# Altium PCB cando_pro_set.PcbDoc (part 3 of 3)
Units mm, origin at the board's own origin, x right, y up, seen from the top; angles counter-clockwise.
Board outline 91.6 x 86.4 mm, 2 copper layers (Top Layer, Bottom Layer); 320 components, 25 nets, 1260 pads, 588 vias.
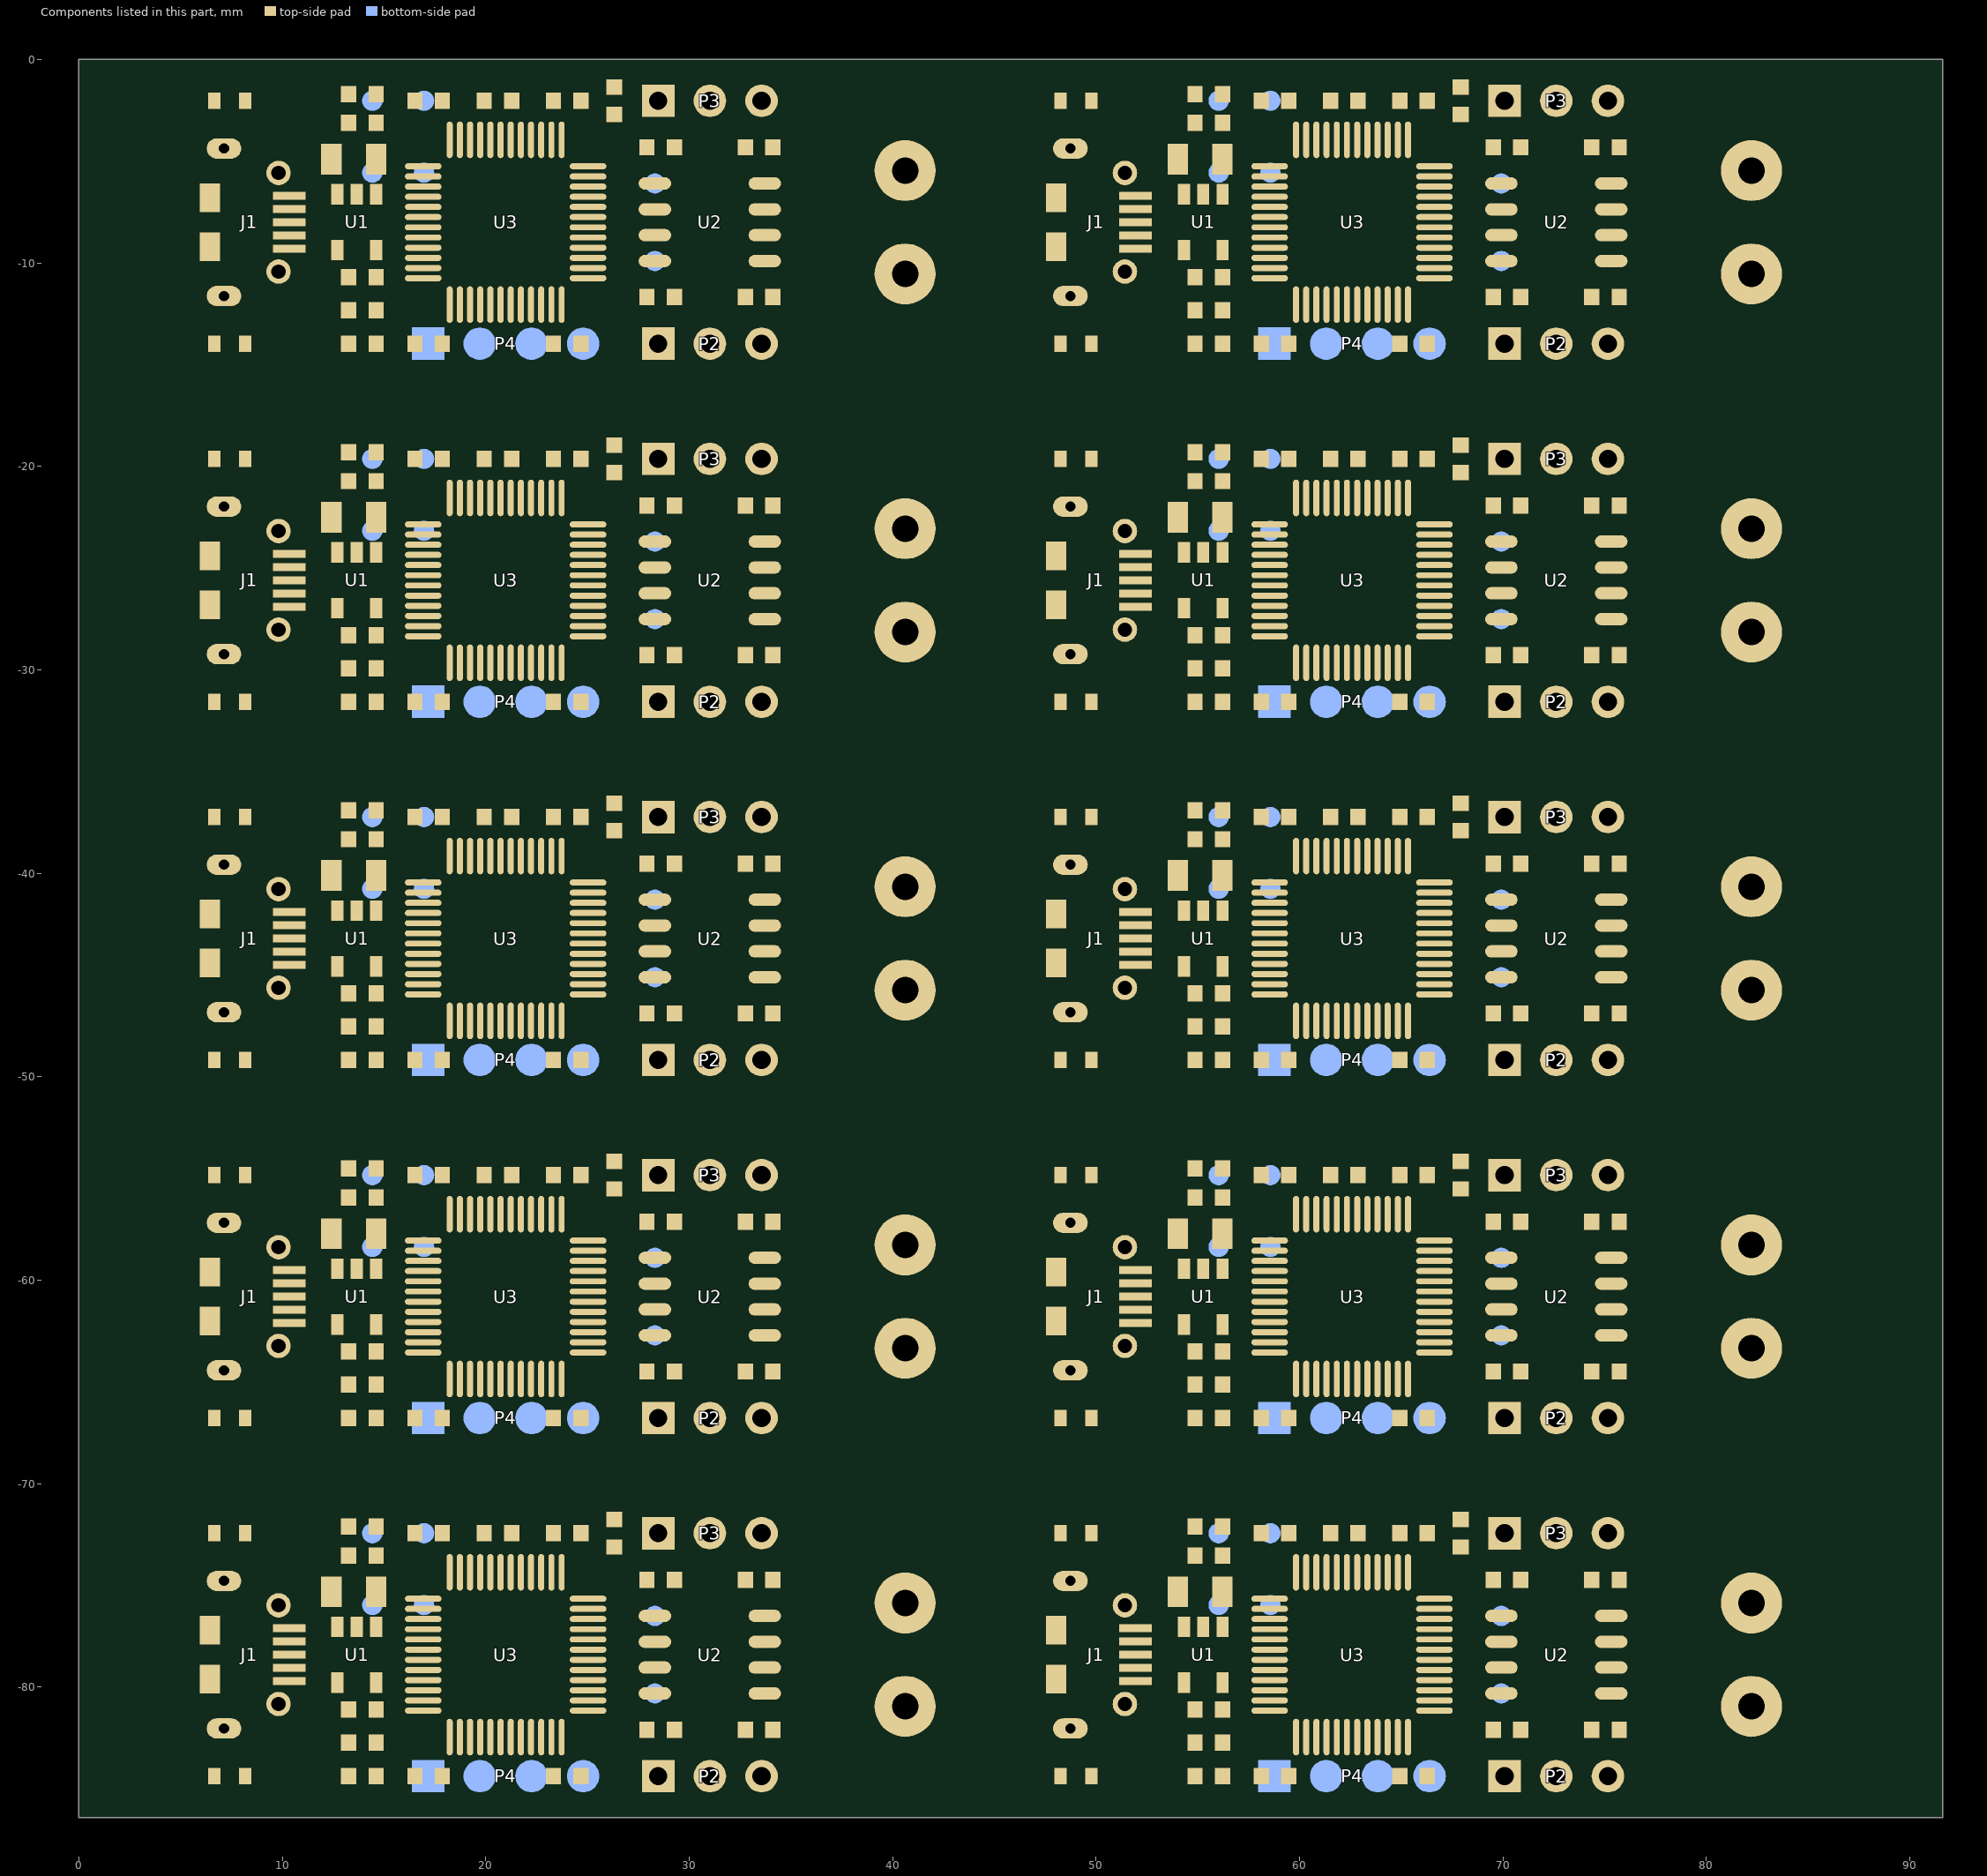
[diagram p3: the components of this part, seen from the top]

## Polygon pours and split planes (outlines as drawn) (continued)
no net on Bottom Layer "Bottom" (solid, remove dead copper, pour order 86): 47.6,-68.8 cw(c47.6,-67.8) 46.6,-67.8 46.6,-53.8 cw(c47.6,-53.8) 47.6,-52.8 50.6,-52.801 50.6,-52.8 ccw(c51.6,-52.8) 52.6,-52.8 52.6,-52.801 80.6,-52.8 ccw(c81.6,-52.8) 82.6,-52.8 85.6,-52.8 cw(c85.6,-53.8) 86.6,-53.8 86.6,-67.8 cw(c85.6,-67.8) 85.6,-68.8 82.6,-68.799 82.6,-68.8 ccw(c81.6,-68.8) 80.6,-68.8 80.6,-68.799 52.6,-68.799 52.6,-68.8 ccw(c51.6,-68.8) 50.6,-68.8 50.6,-68.799
no net on Bottom Layer "Bottom" (solid, remove dead copper, pour order 90): 6,-86.4 cw(c6,-85.4) 5,-85.4 5,-71.4 cw(c6,-71.4) 6,-70.4 9,-70.401 9,-70.4 ccw(c10,-70.4) 11,-70.4 11,-70.401 39,-70.4 ccw(c40,-70.4) 41,-70.4 44,-70.4 cw(c44,-71.4) 45,-71.4 45,-85.4 cw(c44,-85.4) 44,-86.4 41,-86.399 41,-86.4 ccw(c40,-86.4) 39,-86.4 39,-86.399 11,-86.399 11,-86.4 ccw(c10,-86.4) 9,-86.4 9,-86.399
no net on Bottom Layer "Bottom" (solid, remove dead copper, pour order 94): 47.6,-86.4 cw(c47.6,-85.4) 46.6,-85.4 46.6,-71.4 cw(c47.6,-71.4) 47.6,-70.4 50.6,-70.401 50.6,-70.4 ccw(c51.6,-70.4) 52.6,-70.4 52.6,-70.401 80.6,-70.4 ccw(c81.6,-70.4) 82.6,-70.4 85.6,-70.4 cw(c85.6,-71.4) 86.6,-71.4 86.6,-85.4 cw(c85.6,-85.4) 85.6,-86.4 82.6,-86.399 82.6,-86.4 ccw(c81.6,-86.4) 80.6,-86.4 80.6,-86.399 52.6,-86.399 52.6,-86.4 ccw(c51.6,-86.4) 50.6,-86.4 50.6,-86.399

## Keep-outs
Keep-Out Layer:
  lines w0.15: 9,-68.8 cw(c10,-68.8) 11,-68.8 21.8,-68.8 21.8,-70.4 11,-70.4 cw(c10,-70.4) 9,-70.4 6,-70.4 ccw(c6,-71.4) 5,-71.4 5,-85.4 ccw(c6,-85.4) 6,-86.4 ; 9,-68.799 6,-68.8 cw(c6,-67.8) 5,-67.8 5,-53.8 cw(c6,-53.8) 6,-52.8 9,-52.801 ccw(c10,-52.8) 11,-52.8 21.8,-52.8 21.8,-51.2 11,-51.2 ccw(c10,-51.2) 9,-51.2 ; 9,-51.199 6,-51.2 cw(c6,-50.2) 5,-50.2 5,-36.2 cw(c6,-36.2) 6,-35.2 9,-35.201 ; 9,-35.2 ccw(c10,-35.2) 11,-35.2 21.8,-35.2 21.8,-33.6 11,-33.6 ccw(c10,-33.6) 9,-33.6 6,-33.6 cw(c6,-32.6) 5,-32.6 5,-18.6 cw(c6,-18.6) 6,-17.6 9,-17.601 ccw(c10,-17.6) 11,-17.6 21.8,-17.6 21.8,-16 11,-16 ccw(c10,-16) 9,-16 6,-16 cw(c6,-15) 5,-15 5,-1 cw(c6,-1) 6,0 ; 41,-86.4 ccw(c40,-86.4) 39,-86.4 11,-86.399 ccw(c10,-86.4) 9,-86.4 6,-86.4 ; 41,-86.399 44,-86.4 ccw(c44,-85.4) 45,-85.4 45,-81.6 46.6,-81.6 46.6,-85.4 ccw(c47.6,-85.4) 47.6,-86.4 50.6,-86.399 cw(c51.6,-86.4) 52.6,-86.4 80.6,-86.399 cw(c81.6,-86.4) 82.6,-86.4 ; 41,-68.8 ccw(c40,-68.8) 39,-68.8 28.2,-68.8 28.2,-70.4 39,-70.4 ccw(c40,-70.4) 41,-70.4 44,-70.4 cw(c44,-71.4) 45,-71.4 45,-75.2 46.6,-75.2 46.6,-71.4 cw(c47.6,-71.4) 47.6,-70.4 50.6,-70.401 ccw(c51.6,-70.4) 52.6,-70.4 63.4,-70.4 63.4,-68.8 52.6,-68.8 ccw(c51.6,-68.8) 50.6,-68.8 ; 41,-68.799 44,-68.8 ccw(c44,-67.8) 45,-67.8 45,-64 46.6,-64 46.6,-67.8 ccw(c47.6,-67.8) 47.6,-68.8 50.6,-68.799 ; 41,-52.8 44,-52.8 cw(c44,-53.8) 45,-53.8 45,-57.6 46.6,-57.6 46.6,-53.8 cw(c47.6,-53.8) 47.6,-52.8 50.6,-52.801 ccw(c51.6,-52.8) 52.6,-52.8 63.4,-52.8 63.4,-51.2 52.6,-51.2 ccw(c51.6,-51.2) 50.6,-51.2 ; 41,-52.8 cw(c40,-52.8) 39,-52.8 28.2,-52.8 28.2,-51.2 39,-51.2 cw(c40,-51.2) 41,-51.2 ; 41,-51.199 44,-51.2 ccw(c44,-50.2) 45,-50.2 45,-46.4 46.6,-46.4 46.6,-50.2 ccw(c47.6,-50.2) 47.6,-51.2 50.6,-51.199 ; 41,-16 ccw(c40,-16) 39,-16 28.2,-16 28.2,-17.6 39,-17.6 ccw(c40,-17.6) 41,-17.6 44,-17.6 cw(c44,-18.6) 45,-18.6 45,-22.4 46.6,-22.4 46.6,-18.6 cw(c47.6,-18.6) 47.6,-17.6 50.6,-17.601 ccw(c51.6,-17.6) 52.6,-17.6 63.4,-17.6 63.4,-16 52.6,-16 ccw(c51.6,-16) 50.6,-16 47.6,-16 cw(c47.6,-15) 46.6,-15 46.6,-11.2 45,-11.2 45,-15 cw(c44,-15) 44,-16 41,-15.999 ; 50.6,-35.201 47.6,-35.2 ccw(c47.6,-36.2) 46.6,-36.2 46.6,-40 45,-40 45,-36.2 ccw(c44,-36.2) 44,-35.2 41,-35.2 cw(c40,-35.2) 39,-35.2 28.2,-35.2 28.2,-33.6 39,-33.6 cw(c40,-33.6) 41,-33.6 44,-33.6 ccw(c44,-32.6) 45,-32.6 45,-28.8 46.6,-28.8 46.6,-32.6 ccw(c47.6,-32.6) 47.6,-33.6 50.6,-33.599 cw(c51.6,-33.6) 52.6,-33.6 63.4,-33.6 63.4,-35.2 52.6,-35.2 cw(c51.6,-35.2) 50.6,-35.2 ; 82.6,-86.399 85.6,-86.4 ; 82.6,-68.8 ccw(c81.6,-68.8) 80.6,-68.8 69.8,-68.8 69.8,-70.4 80.6,-70.4 ccw(c81.6,-70.4) 82.6,-70.4 85.6,-70.4 cw(c85.6,-71.4) 86.6,-71.4 86.6,-85.4 cw(c85.6,-85.4) 85.6,-86.4 ; 82.6,-68.799 85.6,-68.8 ccw(c85.6,-67.8) 86.6,-67.8 86.6,-53.8 ccw(c85.6,-53.8) 85.6,-52.8 82.6,-52.8 ; 82.6,-52.8 cw(c81.6,-52.8) 80.6,-52.8 69.8,-52.8 69.8,-51.2 80.6,-51.2 cw(c81.6,-51.2) 82.6,-51.2 ; 82.6,-51.199 85.6,-51.2 ccw(c85.6,-50.2) 86.6,-50.2 86.6,-36.2 ccw(c85.6,-36.2) 85.6,-35.2 82.6,-35.2 cw(c81.6,-35.2) 80.6,-35.2 69.8,-35.2 69.8,-33.6 80.6,-33.6 cw(c81.6,-33.6) 82.6,-33.6 85.6,-33.6 ccw(c85.6,-32.6) 86.6,-32.6 86.6,-18.6 ccw(c85.6,-18.6) 85.6,-17.6 82.6,-17.6 cw(c81.6,-17.6) 80.6,-17.6 69.8,-17.6 69.8,-16 80.6,-16 cw(c81.6,-16) 82.6,-16 ; 82.6,-15.999 85.6,-16 ccw(c85.6,-15) 86.6,-15 86.6,-1 ccw(c85.6,-1) 85.6,0 ; 6,-86.4 0,-86.4 0,0 6,0 ; 6,0 9,-0.001 ccw(c10,0) 11,0 39,0 ccw(c40,0) 41,0 44,0 cw(c44,-1) 45,-1 45,-4.8 46.6,-4.8 46.6,-1 cw(c47.6,-1) 47.6,0 50.6,-0.001 ccw(c51.6,0) 52.6,0 80.6,0 ccw(c81.6,0) 82.6,0 85.6,0 ; 85.6,-86.4 91.6,-86.4 91.6,0 85.6,0

## Silkscreen, mask and mechanical layers (free items; w line width, h text height)
Top Overlay:
  text "BOOT" at 35.201,-2.023 h1
  text "BOOT" at 76.801,-2.023 h1
  text "PWR" at 9.039,-2.531 h1
  text "PWR" at 50.639,-2.531 h1
  text "CANH" at 36.191,-7.293 h1 r90
  text "CANH" at 77.791,-7.293 h1 r90
  text "CANL" at 36.191,-12.373 h1 r90
  text "CANL" at 77.791,-12.373 h1 r90
  text "ACT" at 9.039,-14.469 h1
  text "ACT" at 50.639,-14.469 h1
  text "TERM" at 35.201,-14.977 h1
  text "TERM" at 76.801,-14.977 h1
  text "BOOT" at 35.201,-19.623 h1
  text "BOOT" at 76.801,-19.623 h1
  text "PWR" at 9.039,-20.131 h1
  text "PWR" at 50.639,-20.131 h1
  text "CANH" at 36.191,-24.893 h1 r90
  text "CANH" at 77.791,-24.893 h1 r90
  text "CANL" at 36.191,-29.973 h1 r90
  text "CANL" at 77.791,-29.973 h1 r90
  text "ACT" at 9.039,-32.069 h1
  text "ACT" at 50.639,-32.069 h1
  text "TERM" at 35.201,-32.577 h1
  text "TERM" at 76.801,-32.577 h1
  text "BOOT" at 35.201,-37.223 h1
  text "BOOT" at 76.801,-37.223 h1
  text "PWR" at 9.039,-37.731 h1
  text "PWR" at 50.639,-37.731 h1
  text "CANH" at 36.191,-42.493 h1 r90
  text "CANH" at 77.791,-42.493 h1 r90
  text "CANL" at 36.191,-47.573 h1 r90
  text "CANL" at 77.791,-47.573 h1 r90
  text "ACT" at 9.039,-49.669 h1
  text "ACT" at 50.639,-49.669 h1
  text "TERM" at 35.201,-50.177 h1
  text "TERM" at 76.801,-50.177 h1
  text "BOOT" at 35.201,-54.823 h1
  text "BOOT" at 76.801,-54.823 h1
  text "PWR" at 9.039,-55.331 h1
  text "PWR" at 50.639,-55.331 h1
  text "CANH" at 36.191,-60.093 h1 r90
  text "CANH" at 77.791,-60.093 h1 r90
  text "CANL" at 36.191,-65.173 h1 r90
  text "CANL" at 77.791,-65.173 h1 r90
  text "ACT" at 9.039,-67.269 h1
  text "ACT" at 50.639,-67.269 h1
  text "TERM" at 35.201,-67.777 h1
  text "TERM" at 76.801,-67.777 h1
  text "BOOT" at 35.201,-72.423 h1
  text "BOOT" at 76.801,-72.423 h1
  text "PWR" at 9.039,-72.931 h1
  text "PWR" at 50.639,-72.931 h1
  text "CANH" at 36.191,-77.693 h1 r90
  text "CANH" at 77.791,-77.693 h1 r90
  text "CANL" at 36.191,-82.773 h1 r90
  text "CANL" at 77.791,-82.773 h1 r90
  text "ACT" at 9.039,-84.869 h1
  text "ACT" at 50.639,-84.869 h1
  text "TERM" at 35.201,-85.377 h1
  text "TERM" at 76.801,-85.377 h1
Bottom Overlay:
  drawing of 9010 lines, arcs and shapes, not listed
  text "PA3" at 13.28,-2.531 h1
  text "PA2" at 20.702,-2.531 h1
  text "PA3" at 54.88,-2.531 h1
  text "PA2" at 62.302,-2.531 h1
  text "Cando" at 43.456,-2.92 h2.5
  text "Cando" at 85.056,-2.92 h2.5
  text "PA4" at 13.28,-6.062 h1
  text "PA1" at 20.702,-6.062 h1
  text "PA4" at 54.88,-6.062 h1
  text "PA1" at 62.302,-6.062 h1
  text "CAN_TX" at 35.115,-6.511 h1
  text "CAN_TX" at 76.715,-6.511 h1
  text "CAN_RX" at 35.115,-10.321 h1
  text "CAN_RX" at 76.715,-10.321 h1
  text "33" at 18,-12.191 h1
  text "D" at 20.04,-12.191 h1
  text "C" at 22.58,-12.191 h1
  text "G" at 25.12,-12.191 h1
  text "33" at 59.6,-12.191 h1
  text "D" at 61.64,-12.191 h1
  text "C" at 64.18,-12.191 h1
  text "G" at 66.72,-12.191 h1
  text "PA3" at 13.28,-20.131 h1
  text "PA2" at 20.702,-20.131 h1
  text "PA3" at 54.88,-20.131 h1
  text "PA2" at 62.302,-20.131 h1
  text "Cando" at 43.456,-20.52 h2.5
  text "Cando" at 85.056,-20.52 h2.5
  text "PA4" at 13.28,-23.662 h1
  text "PA1" at 20.702,-23.662 h1
  text "PA4" at 54.88,-23.662 h1
  text "PA1" at 62.302,-23.662 h1
  text "CAN_TX" at 35.115,-24.111 h1
  text "CAN_TX" at 76.715,-24.111 h1
  text "CAN_RX" at 35.115,-27.921 h1
  text "CAN_RX" at 76.715,-27.921 h1
  text "33" at 18,-29.791 h1
  text "D" at 20.04,-29.791 h1
  text "C" at 22.58,-29.791 h1
  text "G" at 25.12,-29.791 h1
  text "33" at 59.6,-29.791 h1
  text "D" at 61.64,-29.791 h1
  text "C" at 64.18,-29.791 h1
  text "G" at 66.72,-29.791 h1
  text "PA3" at 13.28,-37.731 h1
  text "PA2" at 20.702,-37.731 h1
  text "PA3" at 54.88,-37.731 h1
  text "PA2" at 62.302,-37.731 h1
  text "Cando" at 43.456,-38.12 h2.5
  text "Cando" at 85.056,-38.12 h2.5
  text "PA4" at 13.28,-41.262 h1
  text "PA1" at 20.702,-41.262 h1
  text "PA4" at 54.88,-41.262 h1
  text "PA1" at 62.302,-41.262 h1
  text "CAN_TX" at 35.115,-41.711 h1
  text "CAN_TX" at 76.715,-41.711 h1
  text "CAN_RX" at 35.115,-45.521 h1
  text "CAN_RX" at 76.715,-45.521 h1
  text "33" at 18,-47.391 h1
  text "D" at 20.04,-47.391 h1
  text "C" at 22.58,-47.391 h1
  text "G" at 25.12,-47.391 h1
  text "33" at 59.6,-47.391 h1
  text "D" at 61.64,-47.391 h1
  text "C" at 64.18,-47.391 h1
  text "G" at 66.72,-47.391 h1
  text "PA3" at 13.28,-55.331 h1
  text "PA2" at 20.702,-55.331 h1
  text "PA3" at 54.88,-55.331 h1
  text "PA2" at 62.302,-55.331 h1
  text "Cando" at 43.456,-55.72 h2.5
  text "Cando" at 85.056,-55.72 h2.5
  text "PA4" at 13.28,-58.862 h1
  text "PA1" at 20.702,-58.862 h1
  text "PA4" at 54.88,-58.862 h1
  text "PA1" at 62.302,-58.862 h1
  text "CAN_TX" at 35.115,-59.311 h1
  text "CAN_TX" at 76.715,-59.311 h1
  text "CAN_RX" at 35.115,-63.121 h1
  text "CAN_RX" at 76.715,-63.121 h1
  text "33" at 18,-64.991 h1
  text "D" at 20.04,-64.991 h1
  text "C" at 22.58,-64.991 h1
  text "G" at 25.12,-64.991 h1
  text "33" at 59.6,-64.991 h1
  text "D" at 61.64,-64.991 h1
  text "C" at 64.18,-64.991 h1
  text "G" at 66.72,-64.991 h1
  text "PA3" at 13.28,-72.931 h1
  text "PA2" at 20.702,-72.931 h1
  text "PA3" at 54.88,-72.931 h1
  text "PA2" at 62.302,-72.931 h1
  text "Cando" at 43.456,-73.32 h2.5
  text "Cando" at 85.056,-73.32 h2.5
  text "PA4" at 13.28,-76.462 h1
  text "PA1" at 20.702,-76.462 h1
  text "PA4" at 54.88,-76.462 h1
  text "PA1" at 62.302,-76.462 h1
  text "CAN_TX" at 35.115,-76.911 h1
  text "CAN_TX" at 76.715,-76.911 h1
  text "CAN_RX" at 35.115,-80.721 h1
  text "CAN_RX" at 76.715,-80.721 h1
  text "33" at 18,-82.591 h1
  text "D" at 20.04,-82.591 h1
  text "C" at 22.58,-82.591 h1
  text "G" at 25.12,-82.591 h1
  text "33" at 59.6,-82.591 h1
  text "D" at 61.64,-82.591 h1
  text "C" at 64.18,-82.591 h1
  text "G" at 66.72,-82.591 h1